# EAGLE board LogiEgl (EAGLE 9.6.2)
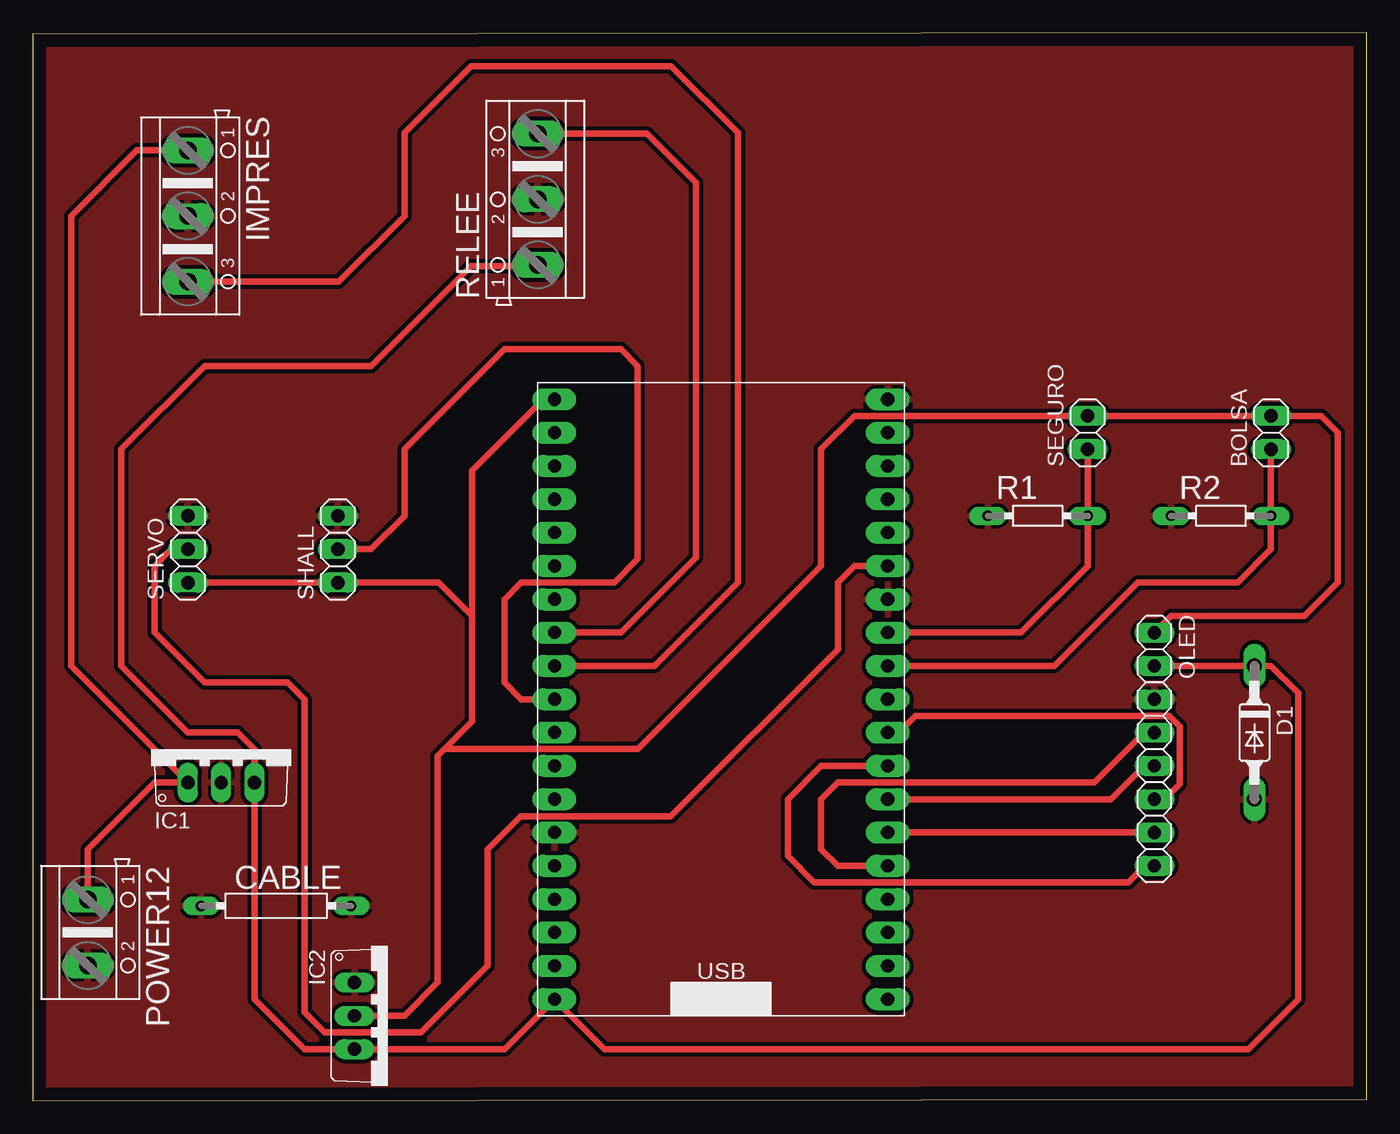
[diagram p0: board, top side]
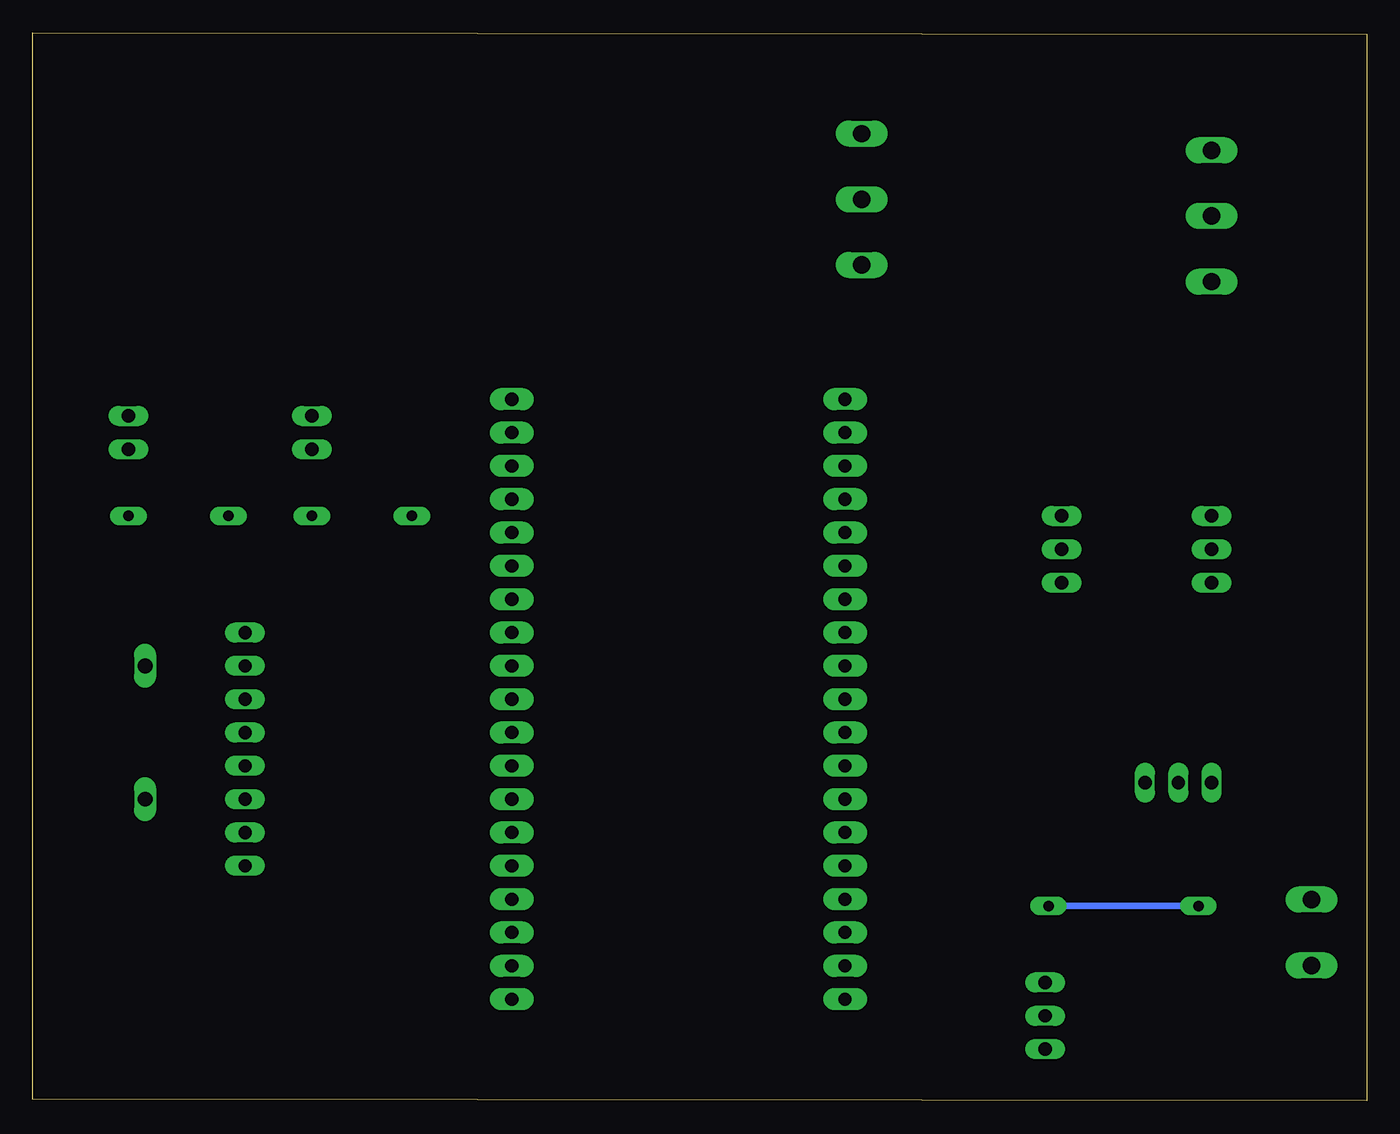
[diagram p1: board, bottom side, seen from below]

Size 101.65 x 81.4 mm. Coordinates in mm from the lower left corner, seen from the top.
Outline: 0,0 101.65,0.13 101.65,81.4 0,81.27 0,0
Copper layers (1*16): Top 0.04mm / dielectric 1.5mm / Bottom 0.04mm
Design rules "default *": minimum track width 0.5mm, minimum drill 0.35mm, track to track 12mil, track to pad 6mil, pad to pad 6mil, via to via 6mil, smd to smd 6mil, copper to edge 40mil, drill to drill 6mil, minimum pad ring 10mil, minimum via ring 8mil, stop-mask expansion 4mil, vias tented up to drill 0mil, thermal gap 10mil

## Footprints (pad centres in the part's own frame; a part is rotated, then mirrored left to right if it is on the bottom)
1X02 = drill 1.016 long: 1 -1.27,0; 2 1.27,0
RS1/2 = drill 0.8 pad 1.4 long: 1 -5.715,0; 2 5.715,0
SOD81 = drill 1.118 long: A 5.08,0; C -5.08,0
TO220V = drill 1.016 long: 1 -2.54,-2.54; 2 0,-2.54; 3 2.54,-2.54
AK500/3 = drill 1.321 long: 1 -5.004,0; 2 0,0; 3 5.004,0
1X08 = drill 1.016 long: 1 -8.89,0; 2 -6.35,0; 3 -3.81,0; 4 -1.27,0; 5 1.27,0; 6 3.81,0; 7 6.35,0; 8 8.89,0
AK500/2 = drill 1.321 long: 1 -2.515,0; 2 2.515,0
RS1/8 = drill 0.8 pad 1.4 long: 1 -3.81,0; 2 3.81,0
1X03 = drill 1.016 long: 1 -2.54,0; 2 0,0; 3 2.54,0
ESP32W = drill 1 pad 1.676 long: 3.3V 1.27,46.99; 5V 1.27,1.27; CLK 26.67,1.27; CMD 1.27,3.81; D2 1.27,8.89; D3 1.27,6.35; EN 1.27,44.45; GND1 1.27,13.97; GND2 26.67,46.99; GND3 26.67,31.75; GPIO0 26.67,13.97; GPIO2 26.67,11.43; GPIO4 26.67,16.51; GPIO5 26.67,24.13; GPIO12 1.27,16.51; GPIO13 1.27,11.43; GPIO14 1.27,19.05; GPIO15 26.67,8.89; GPIO16 26.67,19.05; GPIO17 26.67,21.59; GPIO18 26.67,26.67; GPIO19 26.67,29.21; GPIO21 26.67,34.29; GPIO22 26.67,41.91; GPIO23 26.67,44.45; GPIO25 1.27,26.67; GPIO26 1.27,24.13; GPIO27 1.27,21.59; GPIO32 1.27,31.75; GPIO33 1.27,29.21; GPIO34 1.27,36.83; GPIO35 1.27,34.29; RX 26.67,36.83; SDI 26.67,6.35; SDO 26.67,3.81; TX 26.67,39.37; VN 1.27,39.37; VP 1.27,41.91

## Placement (x,y rotation side)
BOLSA  [1X02]  94.36,50.93 90 top
CABLE  0k  [RS1/2]  18.54,14.86 0 top
D1  [SOD81]  93.09,28.07 270 top
IC1  7805TV  [TO220V]  14.35,26.8 0 top
IC2  LM1117T-3.3-V  [TO220V]  27.05,6.48 270 top
IMPRES  [AK500/3]  11.81,67.44 270 top
OLED  [1X08]  85.47,26.8 270 top
POWER12  [AK500/2]  4.19,12.83 270 top
R1  1k  [RS1/8]  76.58,44.58 0 top
R2  1k  [RS1/8]  90.55,44.58 0 top
RELEE  [AK500/3]  38.48,68.71 90 top
SEGURO  [1X02]  80.39,50.93 90 top
SERVO  [1X03]  11.81,42.04 90 top
SHALL  [1X03]  23.24,42.04 90 top
U$1  ESP32WESP32W  [ESP32W]  38.48,6.48 0 top

## Library data of the parts
BOLSA OLED SEGURO SERVO SHALL = pinhead
CABLE = resistor-power; MF: OHMITE; MPN: RRS1K0E; OC_FARNELL: 1762006; OC_NEWARK: 64K5942
D1 = diode
IC1 = linear
IC2 = lm1117
IMPRES POWER12 RELEE = con-ptr500; OC_FARNELL: unknown; OC_NEWARK: unknown
R1 R2 = resistor-powerV2; OC_FARNELL: unknown; OC_NEWARK: unknown
U$1 = ESP32-WROOM2

## Nets
+3V3: BOLSA.2 IC2.2 OLED.1 SEGURO.2 SERVO.1 SHALL.1 U$1.3.3V
+5V: D1.C IC1.3 IC2.3 OLED.2 RELEE.1 U$1.5V
+12V: IC1.1 IMPRES.1 POWER12.1
CD-DC: OLED.8 U$1.GPIO16
CS: OLED.7 U$1.GPIO0
GND: CABLE.1 CABLE.2 D1.A IC1.2 IC2.1 IMPRES.2 OLED.3 POWER12.2 R1.1 R2.1 RELEE.2 SERVO.3 SHALL.3 U$1.GND1 U$1.GND2 U$1.GND3
IO18: BOLSA.1 R2.2 U$1.GPIO18
IO19: R1.2 SEGURO.1 U$1.GPIO19
IO21: SERVO.2 U$1.GPIO21
IO25: IMPRES.3 U$1.GPIO25
IO26: SHALL.2 U$1.GPIO26
IO27: U$1.GPIO27
IO33: RELEE.3 U$1.GPIO33
MOSI-DATA: OLED.6 U$1.GPIO17
RST: OLED.4 U$1.GPIO2
SCK: OLED.5 U$1.GPIO4

## Tracks (layer width: path | path; a pad name or v marks a point on that pad's centre or on a via)
+3V3
  Top 0.5: U$1.3.3V 38.91,53.47 33.47,48.02 33.47,36.96 | 33.47,36.96 33.47,28.9 31.4,26.83 | OLED.1 86.74,36.96 96.9,36.96 99.44,39.5 99.44,50.93 98.17,52.2 BOLSA.2 SEGURO.2 62.61,52.2 60.07,49.66 60.07,40.77 46.13,26.83 31.4,26.83 | SERVO.1 SHALL.1 30.93,39.5 33.47,36.96 | IC2.2 28.32,6.48 30.86,9.02 30.86,26.29 31.4,26.83
+5V
  Top 0.5: OLED.2 D1.C 94.36,33.15 96.44,31.07 96.44,7.75 92.63,3.94 43.56,3.94 U$1.5V 35.94,3.94 IC2.3 20.7,3.94 16.89,7.75 IC1.3 16.89,26.8 15.62,28.07 11.81,28.07 6.73,33.15 6.73,49.66 13.08,56.01 25.78,56.01 33.4,63.63 38.41,63.63 RELEE.1
+12V
  Top 0.5: IMPRES.1 7.92,72.44 2.92,67.44 2.92,33.15 4.19,31.88
  Top 0.508: POWER12.1 4.19,19.18 9.27,24.26 IC1.1 4.19,31.88
CD-DC
  Top 0.5: OLED.8 84.71,17.91 83.47,16.67 59.52,16.67 57.53,18.65 57.53,22.99 60.07,25.53 U$1.GPIO16
CS
  Top 0.5: OLED.7 84.71,20.45 65.99,20.45 U$1.GPIO0
GND
  Bottom 0.5: CABLE.1 CABLE.2
  pour Top: -0.13,85.22 -0.13,0.25 103.25,0.25 103.25,85.22
IO18
  Top 0.5: U$1.GPIO18 77.85,33.15 84.2,39.5 91.82,39.5 94.36,42.04 R2.2 BOLSA.1
IO19
  Top 0.5: U$1.GPIO19 75.31,35.69 80.39,40.77 R1.2 SEGURO.1
IO21
  Top 0.5: SERVO.2 10.54,42.04 9.27,40.77 9.27,35.69 13.08,31.88 19.43,31.88 20.7,30.61 20.7,6.73 22.22,5.21 29.59,5.21 34.67,10.29 34.67,19.18 37.18,21.69 48.61,21.69 61.34,34.42 61.34,39.5 62.61,40.77 U$1.GPIO21
IO25
  Top 0.5: U$1.GPIO25 47.37,33.15 53.72,39.5 53.72,73.79 48.64,78.87 33.4,78.87 28.32,73.79 28.32,67.44 23.32,62.43 IMPRES.3
IO26
  Top 0.5: SHALL.2 25.78,42.04 28.32,44.58 28.32,49.66 35.94,57.28 44.83,57.28 46.1,56.01 46.1,41.27 44.32,39.5 37.21,39.5 35.94,38.23 35.94,31.88 37.21,30.61 U$1.GPIO26
IO33
  Top 0.5: U$1.GPIO33 44.83,35.69 50.55,41.4 50.55,69.98 46.81,73.71 RELEE.3
MOSI-DATA
  Top 0.5: OLED.6 86.23,22.99 87.4,24.15 87.4,28.55 86.61,29.34 67.26,29.34 65.99,28.07 U$1.GPIO17
RST
  Top 0.5: OLED.4 84.71,28.07 80.9,24.26 61.34,24.26 60.07,22.99 60.07,19.18 61.34,17.91 U$1.GPIO2
SCK
  Top 0.5: OLED.5 84.71,25.53 82.17,22.99 65.99,22.99 U$1.GPIO4